# Altium PCB PuttPilot-Dev.PcbDoc
Units mm, origin at the board's own origin, x right, y up, seen from the top; angles counter-clockwise.
Board outline 110 x 50 mm, 4 copper layers (L01, L02, L03, L04), stack 0.603 mm thick; 125 components, 94 nets, 329 pads, 0 vias.
Unrouted connection lines stored in the file: 233.
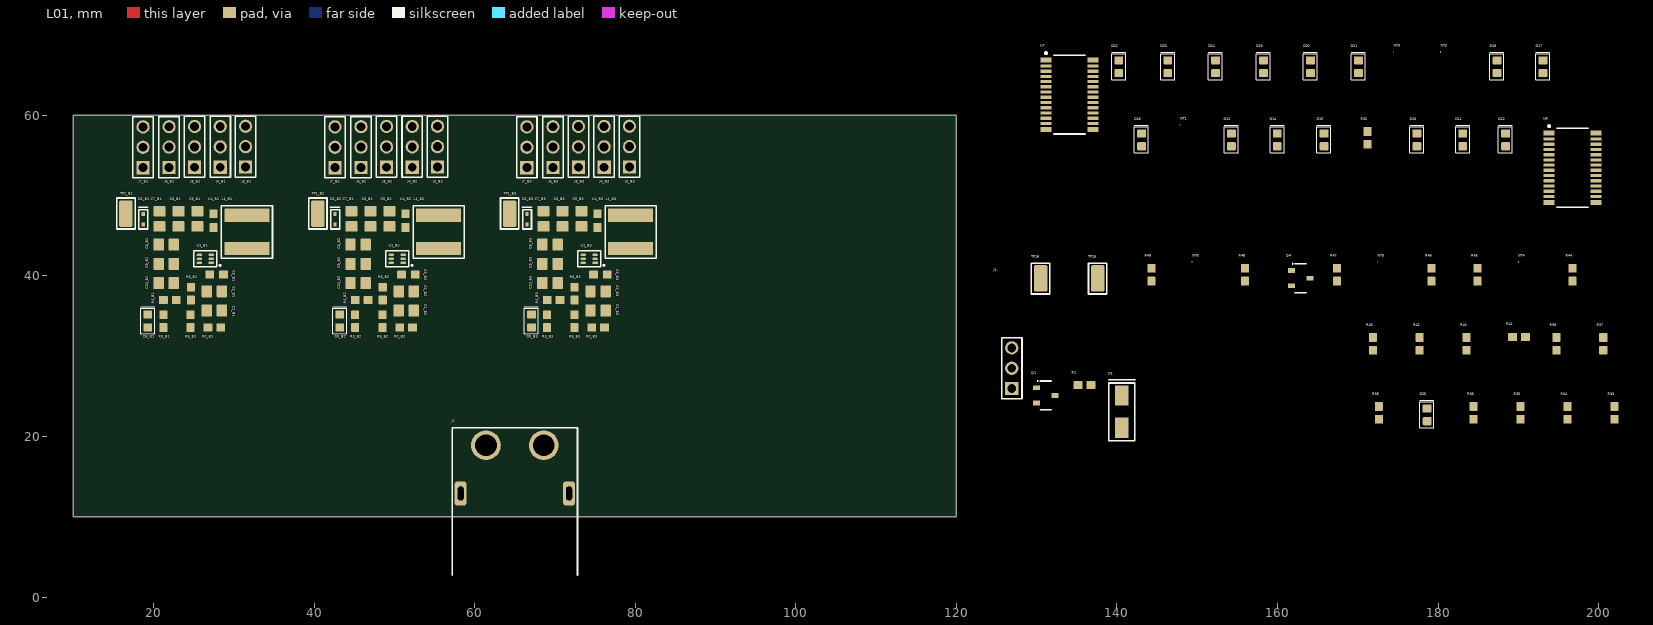
[diagram p0: L01 view]
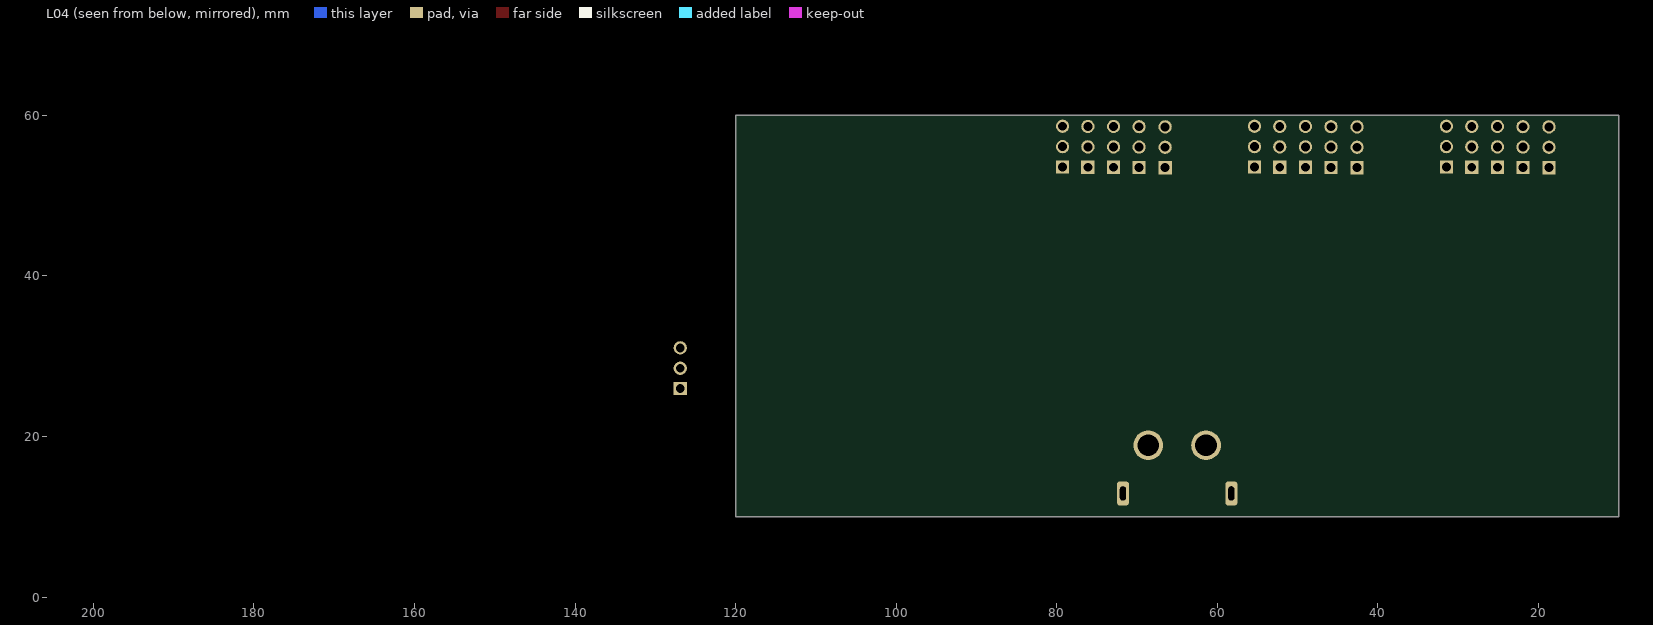
[diagram p1: L04 view, seen from below]

## Layer stack, top to bottom
Top Solder: solder mask 0.0102, Solder Resist, Dk 3.5
L01: signal copper 0.0356
Dielectric 2: prepreg 0.0711, PP-006, Dk 4.1
L02: signal copper 0.035
Dielectric 1: dielectric 0.32, FR-4, Dk 4.8
L03: signal copper 0.035
Dielectric 3: prepreg 0.0711, PP-006, Dk 4.1
L04: signal copper 0.0356
Bottom Solder: solder mask 0.0102, Solder Resist, Dk 3.5

## Board outline
10,10 10,60 120,60 120,10

## Design rules (kind name [scope] priority, off if disabled: settings)
Clearance [All] p1: gap=0.254 ignorepadtopadclearanceinfootprint=FALSE except(0: Arc-Hole Track-Hole SMDPad-Hole THPad-Hole Via-Hole Fill-Hole Poly-Hole Region-Hole Text-Hole)
PolygonConnect [All] p1: connectstyle=Relief reliefconductorwidth=0.254 reliefentries=4 polygonreliefangle="90 Angle" airgapwidth=0.254
RoomDefinition B3 [InComponentClass('B3')] p1: confinementstyle=ConfineIn formatcopy=TRUE lockcomponents=FALSE outline 62.508,31.9 83.413,31.9 83.413,68.959 62.508,68.959
RoomDefinition B2 [InComponentClass('B2')] p2: confinementstyle=ConfineIn formatcopy=TRUE lockcomponents=FALSE outline 38.604,31.9 59.508,31.9 59.508,68.959 38.604,68.959
RoomDefinition B1 [InComponentClass('B1')] p3: confinementstyle=ConfineIn formatcopy=TRUE lockcomponents=FALSE outline 14.7,31.9 35.604,31.9 35.604,68.959 14.7,68.959
RoutingVias [All] p1: holewidth=0.711 width=1.27 viastyle="Through Hole" minholewidth=0.711 minwidth=1.27 maxholewidth=0.711 maxwidth=1.27
SolderMaskExpansion [All] p1: expansion=0.102 istentingtop=FALSE
Width [All] p1: maxlimit=0.254 minlimit=0.254 preferedwidth=0.254
30 further rules are at their usual default settings.

## Classes and differential pairs
component class Hierarchal-Power: D1 J1 J2 Q1 R1
channel class Servo-Power: B1 B2 B3
net class PWM_SERVO5[1..3]: PWM_SERVO51 PWM_SERVO52 PWM_SERVO53
net class PWM_SERVO4[1..3]: PWM_SERVO41 PWM_SERVO42 PWM_SERVO43
net class PWM_SERVO3[1..3]: PWM_SERVO31 PWM_SERVO32 PWM_SERVO33
net class PWM_SERVO2[1..3]: PWM_SERVO21 PWM_SERVO22 PWM_SERVO23
net class PWM_SERVO1[1..3]: PWM_SERVO11 PWM_SERVO12 PWM_SERVO13
net class 6V[1..3]: 6V1 6V2 6V3
component class U_PWM_CONTROL: D10 D11 D12 D13 D14 D15 D16 D17 D18 D19 D20 D21 D22 D23 D24 D25 NT1 NT2 NT3 NT4 NT5 NT6 Q4 R32 R33 R34 R35 R36 R37 R38 R39 R40 R41 R42 R43 R44 R45 R46 R47 R48 R49 TP15 TP16 U6 U7
component class B3: C1_B3 C2_B3 C3_B3 C4_B3 C5_B3 C6_B3 C7_B3 C8_B3 C9_B3 C10_B3 D2_B3 D3_B3 J3_B3 J4_B3 J5_B3 J6_B3 J7_B3 L1_B3 R2_B3 R3_B3 R4_B3 R5_B3 R6_B3 TP1_B3 U1_B3
component class B2: C1_B2 C2_B2 C3_B2 C4_B2 C5_B2 C6_B2 C7_B2 C8_B2 C9_B2 C10_B2 D2_B2 D3_B2 J3_B2 J4_B2 J5_B2 J6_B2 J7_B2 L1_B2 R2_B2 R3_B2 R4_B2 R5_B2 R6_B2 TP1_B2 U1_B2
component class B1: C1_B1 C2_B1 C3_B1 C4_B1 C5_B1 C6_B1 C7_B1 C8_B1 C9_B1 C10_B1 D2_B1 D3_B1 J3_B1 J4_B1 J5_B1 J6_B1 J7_B1 L1_B1 R2_B1 R3_B1 R4_B1 R5_B1 R6_B1 TP1_B1 U1_B1

## Components (designator, comment, footprint, x,y, rotation, side; value= is the part's Value field where it differs from the comment)
C1_B1 "GRM21BR61E226ME44K" .CAP_0805 27.614,38.048 r0 top (schematic designator C1)
C1_B2 "GRM21BR61E226ME44K" .CAP_0805 51.518,38.048 r0 top (schematic designator C1)
C1_B3 "GRM21BR61E226ME44K" .CAP_0805 75.422,38.048 r0 top (schematic designator C1)
C2_B1 "GRM21BR61E226ME44K" .CAP_0805 27.614,35.635 r0 top (schematic designator C2)
C2_B2 "GRM21BR61E226ME44K" .CAP_0805 51.518,35.635 r0 top (schematic designator C2)
C2_B3 "GRM21BR61E226ME44K" .CAP_0805 75.422,35.635 r0 top (schematic designator C2)
C3_B1 "GCJ188R71H104KA12D" .CAP_0603 27.868,40.08 r0 top (schematic designator C3)
C3_B2 "GCJ188R71H104KA12D" .CAP_0603 51.772,40.08 r0 top (schematic designator C3)
C3_B3 "GCJ188R71H104KA12D" .CAP_0603 75.676,40.08 r0 top (schematic designator C3)
C4_B1 "GCJ188R71H104KA12D" .CAP_0603 27.552,46.904 r90 top (schematic designator C4)
C4_B2 "GCJ188R71H104KA12D" .CAP_0603 51.457,46.904 r90 top (schematic designator C4)
C4_B3 "GCJ188R71H104KA12D" .CAP_0603 75.361,46.904 r90 top (schematic designator C4)
C5_B1 "GRM21BR61E226ME44K" .CAP_0805 25.52,47.158 r90 top (schematic designator C5)
C5_B2 "GRM21BR61E226ME44K" .CAP_0805 49.425,47.158 r90 top (schematic designator C5)
C5_B3 "GRM21BR61E226ME44K" .CAP_0805 73.329,47.158 r90 top (schematic designator C5)
C6_B1 "GRM21BR61E226ME44K" .CAP_0805 23.158,47.158 r90 top (schematic designator C6)
C6_B2 "GRM21BR61E226ME44K" .CAP_0805 47.062,47.158 r90 top (schematic designator C6)
C6_B3 "GRM21BR61E226ME44K" .CAP_0805 70.967,47.158 r90 top (schematic designator C6)
C7_B1 "GRM21BR61E226ME44K" .CAP_0805 20.796,47.158 r90 top (schematic designator C7)
C7_B2 "GRM21BR61E226ME44K" .CAP_0805 44.7,47.158 r90 top (schematic designator C7)
C7_B3 "GRM21BR61E226ME44K" .CAP_0805 68.604,47.158 r90 top (schematic designator C7)
C8_B1 "GRM21BR61E226ME44K" .CAP_0805 21.533,43.932 r180 top (schematic designator C8)
C8_B2 "GRM21BR61E226ME44K" .CAP_0805 45.437,43.932 r180 top (schematic designator C8)
C8_B3 "GRM21BR61E226ME44K" .CAP_0805 69.341,43.932 r180 top (schematic designator C8)
C9_B1 "GRM21BR61E226ME44K" .CAP_0805 21.533,41.544 r180 top (schematic designator C9)
C9_B2 "GRM21BR61E226ME44K" .CAP_0805 45.437,41.544 r180 top (schematic designator C9)
C9_B3 "GRM21BR61E226ME44K" .CAP_0805 69.341,41.544 r180 top (schematic designator C9)
C10_B1 "GRM21BR61E226ME44K" .CAP_0805 21.533,39.131 r180 top (schematic designator C10)
C10_B2 "GRM21BR61E226ME44K" .CAP_0805 45.437,39.131 r180 top (schematic designator C10)
C10_B3 "GRM21BR61E226ME44K" .CAP_0805 69.341,39.131 r180 top (schematic designator C10)
D1 "SMAJ12A-13-F" SMAJ12A-13-F 140.6,23.083 r90 top
D2_B1 "ESD5Z6.0T1G" ESD5Z6.0T1G 18.713,47.056 r270 top (schematic designator D2)
D2_B2 "ESD5Z6.0T1G" ESD5Z6.0T1G 42.617,47.056 r270 top (schematic designator D2)
D2_B3 "ESD5Z6.0T1G" ESD5Z6.0T1G 66.522,47.056 r270 top (schematic designator D2)
D3_B1 "LTST-C191KGKT" .LED_0603 19.247,34.338 r90 top (schematic designator D3)
D3_B2 "LTST-C191KGKT" .LED_0603 43.151,34.338 r90 top (schematic designator D3)
D3_B3 "LTST-C191KGKT" .LED_0603 67.055,34.338 r90 top (schematic designator D3)
D10 "LTST-C191KGKT" .LED_0603 177.321,56.9 r90 top
D11 "LTST-C191KGKT" .LED_0603 183.036,56.9 r90 top
D12 "LTST-C191KGKT" .LED_0603 188.37,56.9 r90 top
D13 "LTST-C191KGKT" .LED_0603 154.207,56.9 r90 top
D14 "LTST-C191KGKT" .LED_0603 159.922,56.9 r90 top
D15 "LTST-C191KGKT" .LED_0603 165.764,56.9 r90 top
D16 "LTST-C191KGKT" .LED_0603 187.301,66 r90 top
D17 "LTST-C191KGKT" .LED_0603 193.016,66 r90 top
D18 "LTST-C191KGKT" .LED_0603 143.031,56.9 r90 top
D19 "LTST-C191KGKT" .LED_0603 158.218,66 r90 top
D20 "LTST-C191KGKT" .LED_0603 164.06,66 r90 top
D21 "LTST-C191KGKT" .LED_0603 170.029,66 r90 top
D22 "LTST-C191KGKT" .LED_0603 140.184,66 r90 top
D23 "LTST-C191KGKT" .LED_0603 146.28,66 r90 top
D24 "LTST-C191KGKT" .LED_0603 152.249,66 r90 top
D25 "LTST-C191KGKT" .LED_0603 178.589,22.647 r90 top
J1 "TSW-101-08-G-T-RA" HEADER_3POS_R/A_2.54MM 126.828,27.891 r0 top
J2 "XT60PW-M" XT60PW-M 65,12.9 r180 top
J3_B1 "TSW-101-08-G-T-RA" HEADER_3POS_R/A_2.54MM 31.392,55.489 r0 top (schematic designator J3)
J3_B2 "TSW-101-08-G-T-RA" HEADER_3POS_R/A_2.54MM 55.296,55.489 r0 top (schematic designator J3)
J3_B3 "TSW-101-08-G-T-RA" HEADER_3POS_R/A_2.54MM 79.2,55.489 r0 top (schematic designator J3)
J4_B1 "TSW-101-08-G-T-RA" HEADER_3POS_R/A_2.54MM 28.242,55.464 r0 top (schematic designator J4)
J4_B2 "TSW-101-08-G-T-RA" HEADER_3POS_R/A_2.54MM 52.147,55.464 r0 top (schematic designator J4)
J4_B3 "TSW-101-08-G-T-RA" HEADER_3POS_R/A_2.54MM 76.051,55.464 r0 top (schematic designator J4)
J5_B1 "TSW-101-08-G-T-RA" HEADER_3POS_R/A_2.54MM 25.042,55.464 r0 top (schematic designator J5)
J5_B2 "TSW-101-08-G-T-RA" HEADER_3POS_R/A_2.54MM 48.946,55.464 r0 top (schematic designator J5)
J5_B3 "TSW-101-08-G-T-RA" HEADER_3POS_R/A_2.54MM 72.85,55.464 r0 top (schematic designator J5)
J6_B1 "TSW-101-08-G-T-RA" HEADER_3POS_R/A_2.54MM 21.863,55.438 r0 top (schematic designator J6)
J6_B2 "TSW-101-08-G-T-RA" HEADER_3POS_R/A_2.54MM 45.767,55.438 r0 top (schematic designator J6)
J6_B3 "TSW-101-08-G-T-RA" HEADER_3POS_R/A_2.54MM 69.671,55.438 r0 top (schematic designator J6)
J7_B1 "TSW-101-08-G-T-RA" HEADER_3POS_R/A_2.54MM 18.616,55.413 r0 top (schematic designator J7)
J7_B2 "TSW-101-08-G-T-RA" HEADER_3POS_R/A_2.54MM 42.52,55.413 r0 top (schematic designator J7)
J7_B3 "TSW-101-08-G-T-RA" HEADER_3POS_R/A_2.54MM 66.424,55.413 r0 top (schematic designator J7)
L1_B1 "SRP6060FA-5R6M" SRP6060FA-5R6M 31.616,45.481 r90 top (schematic designator L1)
L1_B2 "SRP6060FA-5R6M" SRP6060FA-5R6M 55.521,45.481 r90 top (schematic designator L1)
L1_B3 "SRP6060FA-5R6M" SRP6060FA-5R6M 79.425,45.481 r90 top (schematic designator L1)
NT1 ".NET_TIE" .NET_TIE 147.857,58.805 r90 top
NT2 ".NET_TIE" .NET_TIE 180.316,67.905 r90 top
NT3 ".NET_TIE" .NET_TIE 174.474,67.905 r90 top
NT4 ".NET_TIE" .NET_TIE 190.003,41.752 r90 top
NT5 ".NET_TIE" .NET_TIE 172.477,41.752 r90 top
NT6 ".NET_TIE" .NET_TIE 149.363,41.752 r90 top
Q1 "DMN6140L-7" .SOT-23-3 131.075,24.988 r0 top
Q4 "DMN6140L-7" .SOT-23-3 162.825,39.593 r0 top
R1 "RC0603FR-071KL" .RES_0603 135.901,26.385 r0 top
R2_B1 "ERJ-3EKF2002V" .RES_0603 27.527,33.569 r0 top (schematic designator R2)
R2_B2 "ERJ-3EKF2002V" .RES_0603 51.431,33.569 r0 top (schematic designator R2)
R2_B3 "ERJ-3EKF2002V" .RES_0603 75.335,33.569 r0 top (schematic designator R2)
R3_B1 "RC0603FR-071KL" .RES_0603 21.228,34.313 r90 top (schematic designator R3)
R3_B2 "RC0603FR-071KL" .RES_0603 45.132,34.313 r90 top (schematic designator R3)
R3_B3 "RC0603FR-071KL" .RES_0603 69.036,34.313 r90 top (schematic designator R3)
R4_B1 "RC0603FR-0788K7L" .RES_0603 22.066,37.023 r180 top (schematic designator R4)
R4_B2 "RC0603FR-0788K7L" .RES_0603 45.97,37.023 r180 top (schematic designator R4)
R4_B3 "RC0603FR-0788K7L" .RES_0603 69.874,37.023 r180 top (schematic designator R4)
R5_B1 "RC0603FR-0710KL" .RES_0603 24.606,34.407 r270 top (schematic designator R5)
R5_B2 "RC0603FR-0710KL" .RES_0603 48.51,34.407 r270 top (schematic designator R5)
R5_B3 "RC0603FR-0710KL" .RES_0603 72.414,34.407 r270 top (schematic designator R5)
R6_B1 "RC0603FR-0710KL" .RES_0603 24.631,37.836 r270 top (schematic designator R6)
R6_B2 "RC0603FR-0710KL" .RES_0603 48.536,37.836 r270 top (schematic designator R6)
R6_B3 "RC0603FR-0710KL" .RES_0603 72.44,37.836 r270 top (schematic designator R6)
R32 "RC0603FR-0710KL" .RES_0603 171.225,57.154 r90 top
R33 "RC0603FR-07240RL" .RES_0603 201.957,22.901 r90 top
R34 "RC0603FR-07240RL" .RES_0603 196.115,22.901 r90 top
R35 "RC0603FR-07240RL" .RES_0603 190.273,22.901 r90 top
R36 "RC0603FR-07240RL" .RES_0603 184.431,22.901 r90 top
R37 "RC0603FR-0710KL" .RES_0603 200.578,31.501 r90 top
R38 "RC0603FR-07240RL" .RES_0603 172.62,22.901 r90 top
R39 "RC0603FR-07240RL" .RES_0603 194.736,31.501 r90 top
R40 "RC0603FR-07240RL" .RES_0603 183.56,31.501 r90 top
R41 "RC0603FR-07240RL" .RES_0603 190.037,32.39 r0 top
R42 "RC0603FR-07240RL" .RES_0603 177.718,31.501 r90 top
R43 "RC0603FR-07240RL" .RES_0603 171.876,31.501 r90 top
R44 "RC0603FR-07240RL" .RES_0603 196.734,40.101 r90 top
R45 "RC0603FR-07240RL" .RES_0603 184.923,40.101 r90 top
R46 "RC0603FR-07240RL" .RES_0603 179.208,40.101 r90 top
R47 "RC0603FR-07240RL" .RES_0603 167.397,40.101 r90 top
R48 "RC0603FR-07240RL" .RES_0603 155.967,40.101 r90 top
R49 "RC0603FR-07240RL" .RES_0603 144.283,40.101 r90 top
TP1_B1 "RCWCTE" RCWCTE 16.474,47.72 r270 top (schematic designator TP1)
TP1_B2 "RCWCTE" RCWCTE 40.378,47.72 r270 top (schematic designator TP1)
TP1_B3 "RCWCTE" RCWCTE 64.283,47.72 r270 top (schematic designator TP1)
TP15 "RCWCTE" RCWCTE 137.679,39.72 r90 top
TP16 "RCWCTE" RCWCTE 130.567,39.72 r90 top
U1_B1 "TPS566242DRLR" TPS566242DRLR 26.449,42.12 r180 top (schematic designator U1)
U1_B2 "TPS566242DRLR" TPS566242DRLR 50.353,42.12 r180 top (schematic designator U1)
U1_B3 "TPS566242DRLR" TPS566242DRLR 74.257,42.12 r180 top (schematic designator U1)
U6 "PCA9685PW,112" PCA9685PW,112 196.752,53.471 r0 top
U7 "PCA9685PW,112" PCA9685PW,112 134.088,62.571 r0 top

## Footprints (in the part's own frame and the unit in brackets; to place one, negate y for a bottom-side part, rotate by r counter-clockwise, add the part's x,y. Pads: shape width x height; smd on the part's side, far side on the other; paste and mask are expansions set on the pad)
.CAP_0603 [mm] "GENERIC 0603 CAPACITOR"
  rrect15% 1.1x1 smd: 1(-0.873,0.07) 2(0.827,0.07)
  body extent -0.9,-0.38 0.85,0.57, height 0.87
.CAP_0805 [mm] "GENERIC 0805 CAPACITOR"
  rrect15% 1.3x1.5 smd: 1(-0.995,0.036) 2(0.905,0.036)
  body extent -1.14,-0.66 1.05,0.79, height 1.39
.LED_0603 [mm] ".GENERIC 0603 LED"
  rrect20% 1x1.1 smd: 1(-0.75,-0.04) 2(0.85,-0.04)
  silkscreen extent -1.55,-0.89 1.85,0.86, body extent -0.76,-0.44 0.86,0.36, height 0.6
.NET_TIE [mm]
  rrect15% 0.1x0.1 smd paste-2539.97 mask+0: 1(-0.025,0) 2(0.025,0)
.RES_0603 [mm] "GENERIC 0603 RESISTOR"
  rrect15% 1.1x1 smd: 1(-0.757,0.011) 2(0.843,0.011)
  body extent -0.76,-0.39 0.84,0.41, height 0.46
.SOT-23-3 [mm]
  rrect15% 0.9x0.6 smd: 1(-1.096,1.073) 2(-1.096,-0.827) 3(1.204,0.123)
  silkscreen extent -1,-1.68 0.75,1.97, body extent -1.25,-1.38 1.35,1.62, height 1.1
ESD5Z6.0T1G [mm]
  rect 0.48x0.4 smd: 1(-0.66,0) 2(0.66,0)
  silkscreen extent -1.5,-0.58 1.22,0.56, body extent -0.85,-0.44 0.85,0.44, height 0.46
HEADER_3POS_R/A_2.54MM [mm]
  rect 1.65x1.65 / inner round 1.65 / far side rect 1.65x1.65 hole 1.1: 1(0.072,-1.931)
  round 1.65 hole 1.1: 2(0.072,0.609) 3(0.072,3.149)
  silkscreen extent -1.2,-3.2 1.34,4.42, body extent -1.2,-2.25 1.34,13.05, height 8.1
PCA9685PW,112 [mm]
  rect 1.35x0.6 smd: 1(-2.924,4.326) 14(-2.924,-4.324) 15(2.926,-4.324) 28(2.926,4.326)
  rect 1.35x0.4 smd: 2(-2.924,3.576) 3(-2.924,2.926) 4(-2.924,2.276) 5(-2.924,1.626) 6(-2.924,0.976) 7(-2.924,0.326) 8(-2.924,-0.324) 9(-2.924,-0.974) 10(-2.924,-1.624) 11(-2.924,-2.274) 12(-2.924,-2.924) 13(-2.924,-3.574) 16(2.926,-3.574) 17(2.926,-2.924) 18(2.926,-2.274) 19(2.926,-1.624) 20(2.926,-0.974) 21(2.926,-0.324) 22(2.926,0.326) 23(2.926,0.976) 24(2.926,1.626) 25(2.926,2.276) 26(2.926,2.926) 27(2.926,3.576)
  silkscreen extent -3.05,-4.9 1.96,5.3, body extent -3.3,-4.9 3.3,4.9, height 1.09
RCWCTE [mm]
  rrect25% 3.3x1.7 smd: 1(-0.03,0.08)
  silkscreen extent -1.98,-1.06 1.87,1.22, body extent -1.63,-0.72 1.57,0.88, height 2.01
SMAJ12A-13-F [mm]
  rect 2.5x1.7 smd: 1(-2,0) 2(2,0)
  silkscreen extent -3.62,-1.64 3.98,1.62, body extent -2.8,-1.46 2.8,1.46, height 2.35
SRP6060FA-5R6M [mm]
  rect 1.65x5.6 smd: 1(-2.075,0) 2(2.075,0)
  silkscreen extent -3.26,-3.2 3.24,3.16, body extent -3.2,-3.3 3.2,3.3, height 5.91
TPS566242DRLR [mm]
  rect 0.67x0.3 smd mask+0.075: 1(-0.74,0.5)
  oval 0.67x0.3 smd mask+0.075: 2(-0.74,0) 3(-0.74,-0.5) 4(0.74,-0.5) 5(0.74,0) 6(0.74,0.5)
  silkscreen extent -1.9,-1 1.44,1, body extent -0.8,-0.78 0.8,0.78, height 0.6
XT60PW-M [mm] "XT60 Male"
  round 3.7 hole 2.7: 1(3.6,-6) 2(-3.6,-6)
  rrect50% 1.5x3 hole 0.75 slot 1.75 at 90 deg: MH0(-6.75,0) MH1(6.75,0)
  silkscreen extent -7.8,-8.2 7.8,10.2, body extent -7.75,-7.85 7.75,10.35, height 8.41

## Part data
C1_B1 C1_B2 C1_B3 C2_B1 C2_B2 C2_B3 C5_B1 C5_B2 C5_B3 C6_B1 C6_B2 C6_B3 C7_B1 C7_B2 C7_B3 C8_B1 C8_B2 C8_B3 C9_B1 C9_B2 C9_B3 C10_B1 C10_B2 C10_B3: "CAP CER 22uF 25V X5R 0805", Capacitance=22uF, Capacitor Type=Ceramic, Manufacturer=Murata, Max Operating Temperature=85°C, Min Operating Temperature=-55°C, Negative Tolerance=20%, Package Shape=Rectangular, Package Style=SMTMeter, Rated DC Voltage (URdc)=25V, Supplier Part Number 1=1092989, Temperature Characteristics Code=X5R, Category="Ceramic Capacitors", ComponentLink1Description=https://datasheet.ciiva.com:443/pdfs/VipMasterIC/IC/MURE/MURE-S-A0002977178/MURE-S-A0002978778-1.pdf?src-supplier=IHS+Markit, ComponentLink1URL=https://datasheet.ciiva.com:443/pdfs/VipMasterIC/IC/MURE/MURE-S-A0002977178/MURE-S-A0002978778-1.pdf?src-supplier=IHS+Markit, ComponentLink2Description=http://www.mouser.com/ds/2/281/c02e-2905.pdf?src-supplier=Mouser, ComponentLink2URL=http://www.mouser.com/ds/2/281/c02e-2905.pdf?src-supplier=Mouser, ComponentLink3Description=https://datasheet.octopart.com/GRM21BR61E226ME44K-Murata-datasheet-155345081.pdf?src-supplier=Element14, ComponentLink3URL=https://datasheet.octopart.com/GRM21BR61E226ME44K-Murata-datasheet-155345081.pdf?src-supplier=Element14, ComponentLink4Description=http://search.murata.co.jp/Ceramy/image/img/A01X/G101/ENG/GRM21BR61E226ME44-01.pdf?src-supplier=Digikey, ComponentLink4URL=http://search.murata.co.jp/Ceramy/image/img/A01X/G101/ENG/GRM21BR61E226ME44-01.pdf?src-supplier=Digikey, ComponentLink5Description=https://search.murata.co.jp/Ceramy/image/img/A01X/G101/ENG/GRM21BR61E226ME44-01.pdf?src-supplier=Digikey, ComponentLink5URL=https://search.murata.co.jp/Ceramy/image/img/A01X/G101/ENG/GRM21BR61E226ME44-01.pdf?src-supplier=Digikey, ComponentLink6Description=https://datasheet.octopart.com/GRM21BR61E226ME44K-Murata-datasheet-99353850.pdf?src-supplier=Future+Electronics, ComponentLink6URL=https://datasheet.octopart.com/GRM21BR61E226ME44K-Murata-datasheet-99353850.pdf?src-supplier=Future+Electronics, ComponentLink7Description=https://datasheet.octopart.com/GRM21BR61E226ME44K-Murata-datasheet-155345081.pdf?src-supplier=Newark, ComponentLink7URL=https://datasheet.octopart.com/GRM21BR61E226ME44K-Murata-datasheet-155345081.pdf?src-supplier=Newark, ComponentLink8Description=https://datasheet.octopart.com/GRM21BR61E226ME44K-Murata-datasheet-165579666.pdf?src-supplier=TME, ComponentLink8URL=https://datasheet.octopart.com/GRM21BR61E226ME44K-Murata-datasheet-165579666.pdf?src-supplier=TME, Dielectric Material=Ceramic, Height=1.25mm, JESD-609 Code=e3, Length=2mm, Manufacturer Part Number=GRM21BR61E226ME44K, Mount="Surface Mount", Multilayer=Yes, Number of Pins=2, Packaging="Tape and Reel", Positive Tolerance=20%, Pricing 1="10000=0.0684, 20000=0.0672, 30000=0.0661 (USD)", Reach SVHC Compliant=Yes, RoHS=Yes, RoHS Compliant=Yes, Size Code=0805, Stock 1=60000, Supplier 1="Future Electronics", Terminal Finish=Nickel, Termination=Wraparound, Width=1.25mm
C3_B1 C3_B2 C3_B3 C4_B1 C4_B2 C4_B3: "CAP CER 0.1uF 50V X7R 0603", Capacitance=0.1uF, Capacitor Type=Ceramic, Manufacturer=Murata, Max Operating Temperature=125°C, Min Operating Temperature=-55°C, Negative Tolerance=10%, Package Shape=Rectangular, Package Style=SMTMeter, Rated DC Voltage (URdc)=50V, Supplier Part Number 1=1158604, Temperature Characteristics Code=X7R, Category="Ceramic Capacitors", ComponentLink1Description=https://psearch.en.murata.com:443/capacitor/product/GCJ188R71H104KA12%23.pdf?src-supplier=IHS+Markit, ComponentLink1URL=https://psearch.en.murata.com:443/capacitor/product/GCJ188R71H104KA12%23.pdf?src-supplier=IHS+Markit, ComponentLink2Description=https://datasheet.ciiva.com/135/product-135604.pdf?src-supplier=Digikey, ComponentLink2URL=https://datasheet.ciiva.com/135/product-135604.pdf?src-supplier=Digikey, ComponentLink3Description=https://datasheet.ciiva.com/26889/getdatasheetpartid-369886-26889118.pdf?src-supplier=Verical, ComponentLink3URL=https://datasheet.ciiva.com/26889/getdatasheetpartid-369886-26889118.pdf?src-supplier=Verical, ComponentLink4Description=https://datasheet.ciiva.com/135/s0717e-135605.pdf?src-supplier=Digikey, ComponentLink4URL=https://datasheet.ciiva.com/135/s0717e-135605.pdf?src-supplier=Digikey, ComponentLink5Description=https://datasheet.ciiva.com/135/s0717e-135606.pdf?src-supplier=Digikey, ComponentLink5URL=https://datasheet.ciiva.com/135/s0717e-135606.pdf?src-supplier=Digikey, ComponentLink6Description=https://datasheet.ciiva.com/16440/c03e-16440425.pdf?src-supplier=Future+Electronics, ComponentLink6URL=https://datasheet.ciiva.com/16440/c03e-16440425.pdf?src-supplier=Future+Electronics, Dielectric Material=Ceramic, Height=0.8mm, JESD-609 Code=e3, Length=1.6mm, Manufacturer Part Number=GCJ188R71H104KA12D, Mount="Surface Mount", Multilayer=Yes, Number of Pins=2, Packaging="Tape and Reel", Positive Tolerance=10%, Pricing 1="4000=0.0182, 12000=0.0178, 20000=0.0176, 80000=0.017, 120000=0.0167 (USD)", Reach SVHC Compliant=Yes, Reference Standard=AEC-Q200, RoHS=Yes, RoHS Compliant=Yes, Size Code=0603, Stock 1=3280000, Supplier 1="Future Electronics", Terminal Finish=Nickel, Termination=Wraparound, Width=0.8mm
D1: "TVS DIODE 12VWM", Breakdown Voltage-Nom=14V, Clamping Voltage-Max=19.9V, Manufacturer=Diodes, Max Breakdown Voltage=14.7V, Max Operating Temperature=150°C, Max Power Dissipation=1W, Min Breakdown Voltage=13.3V, Min Operating Temperature=-55°C, Non-rep Peak Rev Power Dis-Max=400W, Package Body Material=Plastic, Package Shape=Rectangular, Package Style="SMALL OUTLINEMeter", Peak Reflow Temperature (Cel)=260°C, Rep Pk Reverse Voltage-Max=12V, Supplier Part Number 1=SMAJ12A-FDICT-ND, Time @ Peak Reflow Temperature-Max (s)=40s, Additional Feature="EXCELLENT CLAMPING CAPABILITY", Category="TVS Diodes", ComponentLink1Description=https://datasheet.ciiva.com:443/pdfs/VipMasterIC/IC/DIOD/DIOD-S-A0009689838/DIOD-S-A0009691421-1.pdf?src-supplier=IHS+Markit, ComponentLink1URL=https://datasheet.ciiva.com:443/pdfs/VipMasterIC/IC/DIOD/DIOD-S-A0009689838/DIOD-S-A0009691421-1.pdf?src-supplier=IHS+Markit, ComponentLink2Description=https://datasheet.ciiva.com/15143/getdatasheetpartid-164236-15143864.pdf?src-supplier=Verical, ComponentLink2URL=https://datasheet.ciiva.com/15143/getdatasheetpartid-164236-15143864.pdf?src-supplier=Verical, Diode Element Material=SILICON, Diode Type="TRANS VOLTAGE SUPPRESSOR", JESD-30 Code=R-PDSO-C2, JESD-609 Code=e3, Manufacturer Part Number=SMAJ12A-13-F, Moisture Sensitivity Level=1, Number of Elements=1, Number of Pins=2, Polarity=Unidirectional, Pricing 1="1=0.29, 10=0.197, 100=0.1322, 500=0.1019, 1000=0.09178, 2000=0.08313 (USD)", Qualification Status="Not Qualified", Reach SVHC Compliant=No, RoHS=Yes, RoHS Compliant=Yes, Stock 1=25706, Supplier 1=Digikey, Surface Mount=Yes, Technology=AVALANCHE, Terminal Finish=Tin, Terminal Form="C BEND", Terminal Position=DUAL
D2_B1 D2_B2 D2_B3: "TVS DIODE 6VWM", Clamping Voltage-Max=12.4V, Manufacturer="ON Semiconductor", Max Operating Temperature=150°C, Max Power Dissipation=200mW, Min Breakdown Voltage=6.8V, Min Operating Temperature=-55°C, Non-rep Peak Rev Power Dis-Max=181W, Package Body Material=Plastic, Package Shape=Rectangular, Package Style="SMALL OUTLINEMeter", Peak Reflow Temperature (Cel)=260°C, Rep Pk Reverse Voltage-Max=6V, Supplier Part Number 1=6072663, Time @ Peak Reflow Temperature-Max (s)=40s, Additional Feature="UL RECOGNIZED", Category="ESD and Circuit Protection ICs", ComponentLink1Description=https://datasheet.ciiva.com:443/pdfs/VipMasterIC/IC/ONSM/ONSM-S-A0006325923/ONSM-S-A0006325923-1.pdf?src-supplier=IHS+Markit, ComponentLink1URL=https://datasheet.ciiva.com:443/pdfs/VipMasterIC/IC/ONSM/ONSM-S-A0006325923/ONSM-S-A0006325923-1.pdf?src-supplier=IHS+Markit, ComponentLink2Description=https://datasheet.ciiva.com/30478/0900766b8125092b-30478790.pdf?src-supplier=Rs, ComponentLink2URL=https://datasheet.ciiva.com/30478/0900766b8125092b-30478790.pdf?src-supplier=Rs, ComponentLink3Description=https://datasheet.ciiva.com/4510/esd5z2-5t1-d-241596-4510609.pdf?src-supplier=Mouser, ComponentLink3URL=https://datasheet.ciiva.com/4510/esd5z2-5t1-d-241596-4510609.pdf?src-supplier=Mouser, ComponentLink4Description=https://datasheet.ciiva.com/15143/getdatasheetpartid-148103-15143777.pdf?src-supplier=Verical, ComponentLink4URL=https://datasheet.ciiva.com/15143/getdatasheetpartid-148103-15143777.pdf?src-supplier=Verical, ComponentLink5Description=https://datasheet.ciiva.com/22642/1878252-22642024.pdf?src-supplier=Element14, ComponentLink5URL=https://datasheet.ciiva.com/22642/1878252-22642024.pdf?src-supplier=Element14, ComponentLink6Description=https://datasheet.ciiva.com/340/esd5z2-5t1-d-340699.pdf?src-supplier=Digikey, ComponentLink6URL=https://datasheet.ciiva.com/340/esd5z2-5t1-d-340699.pdf?src-supplier=Digikey, ComponentLink7Description=https://datasheet.ciiva.com/340/esd5z2-5t1-d-340700.pdf?src-supplier=Digikey, ComponentLink7URL=https://datasheet.ciiva.com/340/esd5z2-5t1-d-340700.pdf?src-supplier=Digikey, ComponentLink8Description=https://datasheet.ciiva.com/340/esd5z2-5t1-d-340701.pdf?src-supplier=Digikey, ComponentLink8URL=https://datasheet.ciiva.com/340/esd5z2-5t1-d-340701.pdf?src-supplier=Digikey, ComponentLink9Description=https://datasheet.ciiva.com/3304/esd5z2-5t1-d-3304009.pdf?src-supplier=Avnet, ComponentLink9URL=https://datasheet.ciiva.com/3304/esd5z2-5t1-d-3304009.pdf?src-supplier=Avnet, Diode Element Material=SILICON, Diode Type="TRANS VOLTAGE SUPPRESSOR", JESD-30 Code=R-PDSO-F2, JESD-609 Code=e3, Manufacturer Part Number=ESD5Z6.0T1G, Moisture Sensitivity Level=1, Number of Elements=1, Number of Pins=2, Polarity=Unidirectional, Pricing 1="3000=0.0199, 12000=0.0191, 45000=0.0183, 75000=0.018, 150000=0.0171 (USD)", Qualification Status="Not Qualified", Reach SVHC Compliant=Yes, Reference Standard=IEC-61000-4-2, RoHS=Yes, RoHS Compliant=Yes, Stock 1=543000, Supplier 1="Future Electronics", Surface Mount=Yes, Technology=AVALANCHE, Terminal Finish=Tin, Terminal Form=Flat, Terminal Position=DUAL
D3_B1 D3_B2 D3_B3 D10 D11 D12 D13 D14 D15 D16 D17 D18 D19 D20 D21 D22 D23 D24 D25: "LED GREEN 2V 0603", Color=Green, Forward Current-Max=30mA, Forward Voltage-Max=2.4V, Manufacturer="Vishay Lite-On", Max Operating Temperature=85°C, Min Operating Temperature=-55°C, Reverse Voltage-Max=5V, Supplier Part Number 1=160-1446-1-ND, Color@wavelength=Green, ComponentLink1Description=https://datasheet.ciiva.com:443/pdfs/VipMasterIC/IC/LITE/LITE-S-A0003156116/LITE-S-A0003156116-1.pdf?src-supplier=IHS+Markit, ComponentLink1URL=https://datasheet.ciiva.com:443/pdfs/VipMasterIC/IC/LITE/LITE-S-A0003156116/LITE-S-A0003156116-1.pdf?src-supplier=IHS+Markit, ComponentLink2Description=https://datasheet.ciiva.com/2109/ltst-c191kgkt-2109973.pdf?src-supplier=Digikey, ComponentLink2URL=https://datasheet.ciiva.com/2109/ltst-c191kgkt-2109973.pdf?src-supplier=Digikey, JESD-609 Code=e3, Lens Style="WATER CLEAR", Luminous Intensity-Nom=35mcd, Manufacturer Part Number=LTST-C191KGKT, Mount="Surface Mount", Number of Functions=1, Number of Pins=2, Optoelectronic Device Type="SINGLE COLOR LED", Overall Height=0.55mm, Packaging="Tape and Reel", Pricing 1="1=0.22, 10=0.121, 100=0.0721, 500=0.05324, 1000=0.04748, 2000=0.04278 (USD)", Reach SVHC Compliant=Yes, RoHS=Yes, RoHS Compliant=Yes, Shape=Rectangular, Size=1.1mm, Stock 1=171853, Supplier 1=Digikey, Terminal Finish=Tin, Terminal Pitch=1.5mm, Viewing Angle=130°
J1 J3_B1 J3_B2 J3_B3 J4_B1 J4_B2 J4_B3 J5_B1 J5_B2 J5_B3 J6_B1 J6_B2 J6_B3 J7_B1 J7_B2 J7_B3: "CONN HEADER R/A 3POS 2.54MM"
J2: "XT60PW Male", Manufacturer=Unclassified, Supplier Part Number 1=1805375, Manufacturer Part Number=XT60PW-M
L1_B1 L1_B2 L1_B3: "FIXED IND 5.6uH 10A 15.8mOhm", Current Rating=10A, DC Resistance=15.8m, Inductance=5.6uH, Inductor Type="GENERAL PURPOSE INDUCTOR", Manufacturer=Bourns, Supplier Part Number 1=SRP6060FA-5R6MCT-ND, Category="Fixed Inductors", ComponentLink1Description=https://datasheet.ciiva.com:443/pdfs/VipMasterIC/IC/BOUR/BOUR-S-A0006601820/BOUR-S-A0006601820-1.pdf?src-supplier=IHS+Markit, ComponentLink1URL=https://datasheet.ciiva.com:443/pdfs/VipMasterIC/IC/BOUR/BOUR-S-A0006601820/BOUR-S-A0006601820-1.pdf?src-supplier=IHS+Markit, ComponentLink2Description=https://www.bourns.com/docs/Product-Datasheets/SRP6060FA.pdf?src-supplier=Digikey, ComponentLink2URL=https://www.bourns.com/docs/Product-Datasheets/SRP6060FA.pdf?src-supplier=Digikey, ComponentLink3Description=https://datasheet.octopart.com/SRP6060FA-5R6M-Bourns-datasheet-154834317.pdf?src-supplier=Electro+Sonic, ComponentLink3URL=https://datasheet.octopart.com/SRP6060FA-5R6M-Bourns-datasheet-154834317.pdf?src-supplier=Electro+Sonic, ComponentLink4Description=https://datasheet.octopart.com/SRP6060FA-5R6M-Bourns-datasheet-110646386.pdf?src-supplier=Master+Electronics, ComponentLink4URL=https://datasheet.octopart.com/SRP6060FA-5R6M-Bourns-datasheet-110646386.pdf?src-supplier=Master+Electronics, Manufacturer Part Number=SRP6060FA-5R6M, Pricing 1="1=1.86, 10=1.444, 25=1.3052, 50=1.209, 100=1.1199, 250=1.01164 (USD)", Reach SVHC Compliant=Yes, RoHS=Yes, RoHS Compliant=Yes, Stock 1=1553, Supplier 1=Digikey
NT1 NT2 NT3 NT4 NT5 NT6: ".GENERIC NET TIE"
Q1 Q4: "MOSFET N-CH 60V 1.6A SOT-23", Case/Package=SOT-23, Continuous Drain Current (ID)=1.6A, Drain to Source Resistance=140mR, Drain to Source Voltage (Vdss)=60V, Gate to Source Voltage (Vgs)=20V, Input Capacitance=315pF, Manufacturer=Diodes, Max Operating Temperature=150°C, Max Power Dissipation=700mW, Min Operating Temperature=-55°C, Package Quantity=1, Supplier Part Number 1=4046633, Threshold Voltage=3V, Category=MOSFETs, ComponentLink1Description=https://datasheet.ciiva.com/29747/dmn6140l-29747654.pdf?src-supplier=Digikey, ComponentLink1URL=https://datasheet.ciiva.com/29747/dmn6140l-29747654.pdf?src-supplier=Digikey, ComponentLink2Description=https://datasheet.ciiva.com/29747/dmn6140l-29747660.pdf?src-supplier=Digikey, ComponentLink2URL=https://datasheet.ciiva.com/29747/dmn6140l-29747660.pdf?src-supplier=Digikey, Fall Time=2.7ns, Lead Free="Lead Free", Manufacturer Part Number=DMN6140L-7, Mount="Surface Mount", Number of Channels=1, Number of Pins=3, Packaging="Tape and Reel", Polarity=N-CHANNEL, Pricing 1="3000=0.0489, 9000=0.047, 15000=0.0462, 45000=0.0445, 75000=0.043 (USD)", Rds On Max=140mR, Reach SVHC Compliant=No, Rise Time=3.6ns, RoHS=Yes, RoHS Compliant=Yes, Series=-, Stock 1=624000, Supplier 1="Future Electronics", Turn-Off Delay Time=16.3ns, Turn-On Delay Time=2.6ns, Weight=0.000282oz
R1 R3_B1 R3_B2 R3_B3: "RES 1K OHM 0603", Manufacturer=Yageo, Max Operating Temperature=155°C, Min Operating Temperature=-55°C, Package Height=0.45mm, Package Length=1.6mm, Package Shape=Rectangular, Package Style=SMTMeter, Package Width=0.8mm, Rated Power Dissipation (P)=100mW, Rated Temperature=70°C, Resistance=1k, Resistor Type="FIXED RESISTOR", Supplier Part Number 1=4016291, Temperature Coefficient=100ppm/°C, Tolerance=1%, Working Voltage=75V, Additional Feature="LASER TRIMMABLE", Category="Chip SMD Resistors", ComponentLink1Description=https://datasheet.ciiva.com:443/pdfs/VipMasterIC/IC/YAGO/YAGO-S-A0008145938/YAGO-S-A0008145938-1.pdf?src-supplier=IHS+Markit, ComponentLink1URL=https://datasheet.ciiva.com:443/pdfs/VipMasterIC/IC/YAGO/YAGO-S-A0008145938/YAGO-S-A0008145938-1.pdf?src-supplier=IHS+Markit, ComponentLink2Description=https://datasheet.ciiva.com/11808/0900766b80f96399-11808081.pdf?src-supplier=Rs, ComponentLink2URL=https://datasheet.ciiva.com/11808/0900766b80f96399-11808081.pdf?src-supplier=Rs, ComponentLink3Description=https://datasheet.ciiva.com/8896/pyu-rc0603-51-rohs-l-4-8896106.pdf?src-supplier=Avnet, ComponentLink3URL=https://datasheet.ciiva.com/8896/pyu-rc0603-51-rohs-l-4-8896106.pdf?src-supplier=Avnet, ComponentLink4Description=https://datasheet.ciiva.com/7660/1868787-7660790.pdf?src-supplier=Element14, ComponentLink4URL=https://datasheet.ciiva.com/7660/1868787-7660790.pdf?src-supplier=Element14, ComponentLink5Description=https://datasheet.ciiva.com/7746/1738695-7746279.pdf?src-supplier=Element14, ComponentLink5URL=https://datasheet.ciiva.com/7746/1738695-7746279.pdf?src-supplier=Element14, ComponentLink6Description=https://datasheet.ciiva.com/7746/1686128-7746280.pdf?src-supplier=Element14, ComponentLink6URL=https://datasheet.ciiva.com/7746/1686128-7746280.pdf?src-supplier=Element14, ComponentLink7Description=https://datasheet.ciiva.com/7746/1738695-7746281.pdf?src-supplier=Element14, ComponentLink7URL=https://datasheet.ciiva.com/7746/1738695-7746281.pdf?src-supplier=Element14, ComponentLink8Description=https://datasheet.ciiva.com/7983/443971-7983613.pdf?src-supplier=Element14, ComponentLink8URL=https://datasheet.ciiva.com/7983/443971-7983613.pdf?src-supplier=Element14, ComponentLink9Description=https://datasheet.ciiva.com/15189/getdatasheetpartid-404327-15189644.pdf?src-supplier=Verical, ComponentLink9URL=https://datasheet.ciiva.com/15189/getdatasheetpartid-404327-15189644.pdf?src-supplier=Verical, Construction=Chip, JESD-609 Code=e3, Manufacturer Part Number=RC0603FR-071KL, Mount="Surface Mount", Number of Pins=2, Packaging="Tape and Reel", Pricing 1="5000=0.0026, 50000=0.0025, 150000=0.0024, 375000=0.0023, 1000000=0.0022 (USD)", Reach SVHC Compliant=Yes, RoHS=Yes, RoHS Compliant=Yes, Size Code=0603, Stock 1=12810000, Supplier 1="Future Electronics", Technology="METAL GLAZE/THICK FILM", Terminal Finish=Nickel, Termination=Wraparound
R2_B1 R2_B2 R2_B3: "RES 20K OHM 0603", Manufacturer=Panasonic, Max Operating Temperature=155°C, Min Operating Temperature=-55°C, Package Height=0.45mm, Package Length=1.6mm, Package Shape=Rectangular, Package Style=SMTMeter, Package Width=0.8mm, Rated Power Dissipation (P)=100mW, Rated Temperature=70°C, Resistance=20k, Resistor Type="FIXED RESISTOR", Supplier Part Number 1=667-ERJ-3EKF2002V, Temperature Coefficient=100ppm/°C, Tolerance=1%, Working Voltage=75V, Category="Chip SMD Resistors", ComponentLink1Description=https://datasheet.ciiva.com:443/pdfs/VipMasterIC/IC/PANA/PANA-S-A0009889626/PANA-S-A0009889626-1.pdf?src-supplier=IHS+Markit, ComponentLink1URL=https://datasheet.ciiva.com:443/pdfs/VipMasterIC/IC/PANA/PANA-S-A0009889626/PANA-S-A0009889626-1.pdf?src-supplier=IHS+Markit, ComponentLink2Description=https://datasheet.ciiva.com/15158/getdatasheetpartid-248555-15158987.pdf?src-supplier=Verical, ComponentLink2URL=https://datasheet.ciiva.com/15158/getdatasheetpartid-248555-15158987.pdf?src-supplier=Verical, ComponentLink3Description=https://datasheet.ciiva.com/28688/1678782-28688604.pdf?src-supplier=Element14, ComponentLink3URL=https://datasheet.ciiva.com/28688/1678782-28688604.pdf?src-supplier=Element14, ComponentLink4Description=https://datasheet.ciiva.com/46377/1678782-46377365.pdf?src-supplier=Element14, ComponentLink4URL=https://datasheet.ciiva.com/46377/1678782-46377365.pdf?src-supplier=Element14, ComponentLink5Description=https://datasheet.ciiva.com/22749/1678782-22749661.pdf?src-supplier=Element14, ComponentLink5URL=https://datasheet.ciiva.com/22749/1678782-22749661.pdf?src-supplier=Element14, ComponentLink6Description=https://datasheet.ciiva.com/30218/aoa0000ce2-30218069.pdf?src-supplier=Onlinecomponents.com, ComponentLink6URL=https://datasheet.ciiva.com/30218/aoa0000ce2-30218069.pdf?src-supplier=Onlinecomponents.com, Construction=Rectangular, JESD-609 Code=e3, Manufacturer Part Number=ERJ-3EKF2002V, Mount="Surface Mount", Number of Pins=2, Packaging="Tape and Reel", Pricing 1="1=0.1, 10=0.02, 50=0.02, 100=0.012, 1000=0.009, 5000=0.005, 10000=0.005, 25000=0.004 (USD)", Reach SVHC Compliant=Yes, Reference Standard=AEC-Q200, RoHS=Yes, RoHS Compliant=Yes, Size Code=0603, Stock 1=221599, Supplier 1=Mouser, Technology="METAL GLAZE/THICK FILM", Terminal Finish=Nickel, Termination=Wraparound
R4_B1 R4_B2 R4_B3: "RES 88.7K OHM 0603", Manufacturer=Yageo, Max Operating Temperature=155°C, Min Operating Temperature=-55°C, Package Height=0.45mm, Package Length=1.6mm, Package Shape=Rectangular, Package Style=SMTMeter, Package Width=0.8mm, Rated Power Dissipation (P)=100mW, Rated Temperature=70°C, Resistance=88.7k, Resistor Type="FIXED RESISTOR", Supplier Part Number 1=6138945, Temperature Coefficient=100ppm/°C, Tolerance=1%, Working Voltage=75V, Additional Feature="LASER TRIMMABLE", Category="Chip SMD Resistors", ComponentLink1Description=https://datasheet.ciiva.com:443/pdfs/VipMasterIC/IC/YAGO/YAGO-S-A0008145938/YAGO-S-A0008145938-1.pdf?src-supplier=IHS+Markit, ComponentLink1URL=https://datasheet.ciiva.com:443/pdfs/VipMasterIC/IC/YAGO/YAGO-S-A0008145938/YAGO-S-A0008145938-1.pdf?src-supplier=IHS+Markit, ComponentLink2Description=https://datasheet.ciiva.com/2454/pyu-r-int-thick-7-2454108.pdf?src-supplier=Digikey, ComponentLink2URL=https://datasheet.ciiva.com/2454/pyu-r-int-thick-7-2454108.pdf?src-supplier=Digikey, ComponentLink3Description=https://datasheet.ciiva.com/2454/pyu-r-int-thick-7-2454109.pdf?src-supplier=Digikey, ComponentLink3URL=https://datasheet.ciiva.com/2454/pyu-r-int-thick-7-2454109.pdf?src-supplier=Digikey, ComponentLink4Description=https://datasheet.ciiva.com/2454/pyu-r-int-thick-7-2454110.pdf?src-supplier=Digikey, ComponentLink4URL=https://datasheet.ciiva.com/2454/pyu-r-int-thick-7-2454110.pdf?src-supplier=Digikey, ComponentLink5Description=https://datasheet.ciiva.com/8883/pyu-rc0603-51-rohs-l-4-8883082.pdf?src-supplier=Avnet, ComponentLink5URL=https://datasheet.ciiva.com/8883/pyu-rc0603-51-rohs-l-4-8883082.pdf?src-supplier=Avnet, Construction=Chip, JESD-609 Code=e3, Manufacturer Part Number=RC0603FR-0788K7L, Mount="Surface Mount", Number of Pins=2, Packaging="Tape and Reel", Pricing 1="5000=0.0014, 50000=0.0025, 75000=0.0013, 150000=0.0024, 250000=0.0013, 375000=0.0023, 750000=0.0012, 1000000=0.0022, 2500000=0.0011 (USD)", Reach SVHC Compliant=Yes, RoHS=Yes, RoHS Compliant=Yes, Size Code=0603, Stock 1=485000, Supplier 1="Future Electronics", Technology="METAL GLAZE/THICK FILM", Terminal Finish=Nickel, Termination=Wraparound
R5_B1 R5_B2 R5_B3 R6_B1 R6_B2 R6_B3 R32 R37: "RES 10K OHM 0603", Manufacturer=Yageo, Max Operating Temperature=155°C, Min Operating Temperature=-55°C, Package Height=0.45mm, Package Length=1.6mm, Package Shape=Rectangular, Package Style=SMTMeter, Package Width=0.8mm, Rated Power Dissipation (P)=100mW, Rated Temperature=70°C, Resistance=10k, Resistor Type="FIXED RESISTOR", Supplier Part Number 1=4023214, Temperature Coefficient=100ppm/°C, Tolerance=1%, Working Voltage=75V, Additional Feature="LASER TRIMMABLE", Category="Chip SMD Resistors", ComponentLink1Description=https://datasheet.ciiva.com:443/pdfs/VipMasterIC/IC/YAGO/YAGO-S-A0008145938/YAGO-S-A0008145938-1.pdf?src-supplier=IHS+Markit, ComponentLink1URL=https://datasheet.ciiva.com:443/pdfs/VipMasterIC/IC/YAGO/YAGO-S-A0008145938/YAGO-S-A0008145938-1.pdf?src-supplier=IHS+Markit, ComponentLink2Description=https://datasheet.ciiva.com/22747/443971-22747519.pdf?src-supplier=Element14, ComponentLink2URL=https://datasheet.ciiva.com/22747/443971-22747519.pdf?src-supplier=Element14, ComponentLink3Description=https://datasheet.ciiva.com/46440/1868787-46440891.pdf?src-supplier=Element14, ComponentLink3URL=https://datasheet.ciiva.com/46440/1868787-46440891.pdf?src-supplier=Element14, ComponentLink4Description=https://datasheet.ciiva.com/15189/getdatasheetpartid-409289-15189591.pdf?src-supplier=Verical, ComponentLink4URL=https://datasheet.ciiva.com/15189/getdatasheetpartid-409289-15189591.pdf?src-supplier=Verical, ComponentLink5Description=https://datasheet.ciiva.com/7660/38590-7660789.pdf?src-supplier=Element14, ComponentLink5URL=https://datasheet.ciiva.com/7660/38590-7660789.pdf?src-supplier=Element14, ComponentLink6Description=https://datasheet.ciiva.com/7746/1738695-7746239.pdf?src-supplier=Element14, ComponentLink6URL=https://datasheet.ciiva.com/7746/1738695-7746239.pdf?src-supplier=Element14, ComponentLink7Description=https://datasheet.ciiva.com/7983/443971-7983596.pdf?src-supplier=Element14, ComponentLink7URL=https://datasheet.ciiva.com/7983/443971-7983596.pdf?src-supplier=Element14, Construction=Chip, JESD-609 Code=e3, Manufacturer Part Number=RC0603FR-0710KL, Mount="Surface Mount", Number of Pins=2, Packaging="Tape and Reel", Pricing 1="5000=0.0026, 50000=0.0025, 150000=0.0024, 375000=0.0023, 1000000=0.0022 (USD)", Reach SVHC Compliant=Yes, RoHS=Yes, RoHS Compliant=Yes, Size Code=0603, Stock 1=30355000, Supplier 1="Future Electronics", Technology="METAL GLAZE/THICK FILM", Terminal Finish=Nickel, Termination=Wraparound
R33 R34 R35 R36 R38 R39 R40 R41 R42 R43 R44 R45 R46 R47 R48 R49: "RES 240 OHM 0603", Manufacturer=Yageo, Max Operating Temperature=155°C, Min Operating Temperature=-55°C, Package Height=0.45mm, Package Length=1.6mm, Package Shape=Rectangular, Package Style=SMTMeter, Package Width=0.8mm, Rated Power Dissipation (P)=100mW, Rated Temperature=70°C, Resistance=240R, Resistor Type="FIXED RESISTOR", Supplier Part Number 1=5308184, Temperature Coefficient=100ppm/°C, Tolerance=1%, Working Voltage=75V, Additional Feature="LASER TRIMMABLE", Category="Chip SMD Resistors", ComponentLink1Description=https://datasheet.ciiva.com:443/pdfs/VipMasterIC/IC/YAGO/YAGO-S-A0008145938/YAGO-S-A0008145938-1.pdf?src-supplier=IHS+Markit, ComponentLink1URL=https://datasheet.ciiva.com:443/pdfs/VipMasterIC/IC/YAGO/YAGO-S-A0008145938/YAGO-S-A0008145938-1.pdf?src-supplier=IHS+Markit, ComponentLink2Description=https://datasheet.ciiva.com/2508/pyu-r-int-thick-7-2508497.pdf?src-supplier=Digikey, ComponentLink2URL=https://datasheet.ciiva.com/2508/pyu-r-int-thick-7-2508497.pdf?src-supplier=Digikey, ComponentLink3Description=https://datasheet.ciiva.com/2508/pyu-r-int-thick-7-2508498.pdf?src-supplier=Digikey, ComponentLink3URL=https://datasheet.ciiva.com/2508/pyu-r-int-thick-7-2508498.pdf?src-supplier=Digikey, ComponentLink4Description=https://datasheet.ciiva.com/2508/pyu-r-int-thick-7-2508499.pdf?src-supplier=Digikey, ComponentLink4URL=https://datasheet.ciiva.com/2508/pyu-r-int-thick-7-2508499.pdf?src-supplier=Digikey, Construction=Chip, JESD-609 Code=e3, Manufacturer Part Number=RC0603FR-07240RL, Mount="Surface Mount", Number of Pins=2, Packaging="Tape and Reel", Pricing 1="5000=0.0026, 50000=0.0025, 150000=0.0024, 375000=0.0023, 1000000=0.0022 (USD)", Reach SVHC Compliant=Yes, RoHS=Yes, RoHS Compliant=Yes, Size Code=0603, Stock 1=1760000, Supplier 1="Future Electronics", Technology="METAL GLAZE/THICK FILM", Terminal Finish=Nickel, Termination=Wraparound
TP1_B1 TP1_B2 TP1_B3 TP15 TP16: "SMT Test Point", Case Code (Imperial)=1206, Case Code (Metric)=3216, Current Rating=2A, Manufacturer="KOA Speer", Max Operating Temperature=125°C, Min Operating Temperature=-55°C, Resistance=0R, Supplier Part Number 1=2019-RCWCTECT-ND, Case/Package=1206, Category="Chip SMD Resistors", ComponentLink1Description=https://datasheet.ciiva.com/34302/1876186-34302940.pdf?src-supplier=Jameco, ComponentLink1URL=https://datasheet.ciiva.com/34302/1876186-34302940.pdf?src-supplier=Jameco, ComponentLink2Description=https://datasheet.ciiva.com/5556/rc-5556236.pdf?src-supplier=Mouser, ComponentLink2URL=https://datasheet.ciiva.com/5556/rc-5556236.pdf?src-supplier=Mouser, ComponentLink3Description=https://datasheet.ciiva.com/26821/getdatasheetpartid-110197-26821157.pdf?src-supplier=Verical, ComponentLink3URL=https://datasheet.ciiva.com/26821/getdatasheetpartid-110197-26821157.pdf?src-supplier=Verical, Contact Material=Copper,Tin, Depth=1.6mm, Height=2mm, Length=3.2mm, Manufacturer Part Number=RCWCTE, Military Standard=Not, Mount="Surface Mount", Number of Contacts=1, Packaging="Tape and Reel", Pricing 1="1=0.2, 10=0.15, 25=0.1344, 50=0.1238, 100=0.1141, 250=0.10268, 500=0.09488, 1000=0.08781 (USD)", RoHS=Yes, RoHS Compliant=Yes, Series=RC, Stock 1=56953, Supplier 1=Digikey, Termination=SMD/SMT, Width=1.6mm
U1_B1 U1_B2 U1_B3: "BUCK 3V-16V 6A SOT-563", Manufacturer="Texas Instruments", Supplier Part Number 1=595-TPS566242DRLR, Category="Voltage Regulators - Switching", Manufacturer Part Number=TPS566242DRLR, Pricing 1="1=0.77, 10=0.667, 50=0.667, 100=0.511, 1000=0.324, 10000=0.259 (USD)", RoHS=No, Stock 1=5599, Supplier 1=Mouser
U6 U7: "I2C LED Driver", Manufacturer="NXP Semiconductors", Max Operating Temperature=85°C, Max Supply Voltage=5.5V, Min Operating Temperature=-40°C, Min Supply Voltage=2.3V, Package Body Material=Plastic, Package Code=TSSOP, Package Equivalence Code=TSSOP28,.25, Package Shape=Rectangular, Package Style="SMALL OUTLINE, THIN PROFILE, SHRINK PITCHMeter", Peak Reflow Temperature (Cel)=260°C, Power Supplies=2.5/5V, Supplier Part Number 1=85AC2130, Supply Voltage-Nom=3V, Temperature Grade=INDUSTRIAL, Time @ Peak Reflow Temperature-Max (s)=30s, Category="LED Drivers", ComponentLink1Description=https://datasheet.ciiva.com:443/pdfs/VipMasterIC/IC/PHGL/PHGL-S-A0000775254/PHGL-S-A0000775254-1.pdf?src-supplier=IHS+Markit, ComponentLink1URL=https://datasheet.ciiva.com:443/pdfs/VipMasterIC/IC/PHGL/PHGL-S-A0000775254/PHGL-S-A0000775254-1.pdf?src-supplier=IHS+Markit, ComponentLink2Description=https://datasheet.ciiva.com/1945/pca9685-1945096.pdf?src-supplier=Digikey, ComponentLink2URL=https://datasheet.ciiva.com/1945/pca9685-1945096.pdf?src-supplier=Digikey, ComponentLink3Description=https://datasheet.ciiva.com/8125/pca9685-8125354.pdf?src-supplier=Avnet, ComponentLink3URL=https://datasheet.ciiva.com/8125/pca9685-8125354.pdf?src-supplier=Avnet, Data Input Mode=SERIAL, fmax-Min=1MHz, Height - Seated (Max)=1.1mm, Interface IC Type="LED DISPLAY DRIVER", JESD-30 Code=R-PDSO-G28, JESD-609 Code=e4, Length=9.7mm, Manufacturer Part Number=PCA9685PW,112, Moisture Sensitivity Level=1, Multiplexed Display Capability=No, Number of Functions=1, Number of Pins=28, Number of Segments=16, Pricing 1="1=1.3, 10=1.3, 25=1.3, 50=1.3, 100=1.3, 250=1.29, 500=1.27 (USD)", Qualification Status="Not Qualified", Reach SVHC Compliant=Yes, RoHS=Yes, RoHS Compliant=Yes, Stock 1=13575, Supplier 1=Newark, Surface Mount=Yes, Terminal Finish=Gold, Terminal Form="Gull Wing", Terminal Pitch=0.65mm, Terminal Position=DUAL, Width=4.4mm

## Nets (pads, with @x,y where several pads share a name; then routed paths per layer and width w, separated by ;. In a path a pad name is that pad's centre, name@x,y a point inside that pad or via, vN(x,y) a via of type N, cw(c..) or ccw(c..) an arc to the next point about the centre after c; other vN are vias at no path point)
6V1: C4_B1.2 C5_B1.2 C6_B1.2 C7_B1.2 C8_B1.2 C9_B1.2 C10_B1.2 D2_B1.1 J3_B1.2 J4_B1.2 J5_B1.2 J6_B1.2 J7_B1.2 L1_B1.2 R3_B1.2 R4_B1.2 TP1_B1.1
6V2: C4_B2.2 C5_B2.2 C6_B2.2 C7_B2.2 C8_B2.2 C9_B2.2 C10_B2.2 D2_B2.1 J3_B2.2 J4_B2.2 J5_B2.2 J6_B2.2 J7_B2.2 L1_B2.2 R3_B2.2 R4_B2.2 TP1_B2.1
6V3: C4_B3.2 C5_B3.2 C6_B3.2 C7_B3.2 C8_B3.2 C9_B3.2 C10_B3.2 D2_B3.1 J3_B3.2 J4_B3.2 J5_B3.2 J6_B3.2 J7_B3.2 L1_B3.2 R3_B3.2 R4_B3.2 TP1_B3.1
6V_BUS1: J1.2
6V_EN_B1: R2_B1.1 R5_B1.2 U1_B1.5
6V_EN_B2: R2_B2.1 R5_B2.2 U1_B2.5
6V_EN_B3: R2_B3.1 R5_B3.2 U1_B3.5
6V_FB_B1: R4_B1.1 R6_B1.2 U1_B1.6
6V_FB_B2: R4_B2.1 R6_B2.2 U1_B2.6
6V_FB_B3: R4_B3.1 R6_B3.2 U1_B3.6
6V_SW_B1: L1_B1.1 U1_B1.2
6V_SW_B2: L1_B2.1 U1_B2.2
6V_SW_B3: L1_B3.1 U1_B3.2
12V: C1_B1.2 C1_B2.2 C1_B3.2 C2_B1.2 C2_B2.2 C2_B3.2 C3_B1.2 C3_B2.2 C3_B3.2 D1.2 J2.1 R2_B1.2 R2_B2.2 R2_B3.2 U1_B1.1 U1_B2.1 U1_B3.1
GND: C1_B1.1 C1_B2.1 C1_B3.1 C2_B1.1 C2_B2.1 C2_B3.1 C3_B1.1 C3_B2.1 C3_B3.1 C4_B1.1 C4_B2.1 C4_B3.1 C5_B1.1 C5_B2.1 C5_B3.1 C6_B1.1 C6_B2.1 C6_B3.1 C7_B1.1 C7_B2.1 C7_B3.1 C8_B1.1 C8_B2.1 C8_B3.1 C9_B1.1 C9_B2.1 C9_B3.1 C10_B1.1 C10_B2.1 C10_B3.1 D1.1 D2_B1.2 D2_B2.2 D2_B3.2 D3_B1.2 D3_B2.2 D3_B3.2 J1.3 J2.2 J3_B1.3 J3_B2.3 J3_B3.3 J4_B1.3 J4_B2.3 J4_B3.3 J5_B1.3 J5_B2.3 J5_B3.3 J6_B1.3 J6_B2.3 J6_B3.3 J7_B1.3 J7_B2.3 J7_B3.3 NT1.1 NT2.1 NT3.1 NT4.1 NT5.1 NT6.1 Q1.2 Q4.2 R5_B1.1 R5_B2.1 R5_B3.1 R6_B1.1 R6_B2.1 R6_B3.1 R32.1 R37.1 U1_B1.3 U1_B1.4 U1_B2.3 U1_B2.4 U1_B3.3 U1_B3.4 U6.14 U6.25 U7.14 U7.25
I2C_LED_A0: D10.1 D11.1 D12.1 D13.1 D14.1 D15.1 D16.1 D17.1 D18.1 D19.1 D20.1 D21.1 D22.1 D23.1 D24.1 D25.1 R1.2 U6.1 U6.2 U6.3 U6.28 U7.1 U7.3 U7.5 U7.28
I2C_LED_A1: NT4.2 U7.2
I2C_LED_A3: NT5.2 U7.4
I2C_LED_A5: NT6.2 U7.24
I2C_PWM_A3: NT1.2 U6.4
I2C_PWM_A4: NT2.2 U6.5
I2C_PWM_A5: NT3.2 U6.24
I2C_SCL: TP16.1 U6.26 U7.26
I2C_SDA: TP15.1 U6.27 U7.27
LED_PWM_0: Q4.1 U7.6
LED_PWM_1: R33.1 U7.7
LED_PWM_1_n: D10.2 R33.2
LED_PWM_2: R34.1 U7.8
LED_PWM_2_n: D13.2 R34.2
LED_PWM_3: R35.1 U7.9
LED_PWM_3_n: D16.2 R35.2
LED_PWM_4: R36.1 U7.10
LED_PWM_4_n: D19.2 R36.2
LED_PWM_5: R38.1 U7.11
LED_PWM_5_n: D22.2 R38.2
LED_PWM_6: R39.1 U7.12
LED_PWM_6_n: D11.2 R39.2
LED_PWM_7: R40.1 U7.13
LED_PWM_7_n: D14.2 R40.2
LED_PWM_8: R42.1 U7.15
LED_PWM_8_n: D17.2 R42.2
LED_PWM_9: R43.1 U7.16
LED_PWM_9_n: D20.2 R43.2
LED_PWM_10: R44.1 U7.17
LED_PWM_10_n: D23.2 R44.2
LED_PWM_11: R45.1 U7.18
LED_PWM_11_n: D12.2 R45.2
LED_PWM_12: R46.1 U7.19
LED_PWM_12_n: D15.2 R46.2
LED_PWM_13: R47.1 U7.20
LED_PWM_13_n: D18.2 R47.2
LED_PWM_14: R48.1 U7.21
LED_PWM_14_n: D21.2 R48.2
LED_PWM_15: R49.1 U7.22
LED_PWM_15_n: D24.2 R49.2
nEN_IC_LED: R37.2 U7.23
nEN_IC_PWM: R32.2 U6.23
NetD3_B1_1: D3_B1.1 R3_B1.1
NetD3_B2_1: D3_B2.1 R3_B2.1
NetD3_B3_1: D3_B3.1 R3_B3.1
NetD25_2: D25.2 R41.2
NetQ4_3: Q4.3 R41.1
PWM_SERVO11: J3_B1.1
PWM_SERVO12: J3_B2.1
PWM_SERVO13: J3_B3.1
PWM_SERVO21: J4_B1.1
PWM_SERVO22: J4_B2.1
PWM_SERVO23: J4_B3.1
PWM_SERVO31: J5_B1.1
PWM_SERVO32: J5_B2.1
PWM_SERVO33: J5_B3.1
PWM_SERVO41: J6_B1.1
PWM_SERVO42: J6_B2.1
PWM_SERVO43: J6_B3.1
PWM_SERVO51: J7_B1.1
PWM_SERVO52: J7_B2.1
PWM_SERVO53: J7_B3.1
SERVO_PWM_0: Q1.1 U6.6
SERVO_PWM_1: U6.7
SERVO_PWM_2: U6.8
SERVO_PWM_3: U6.9
SERVO_PWM_4: U6.10
SERVO_PWM_5: U6.11
SERVO_PWM_6: U6.12
SERVO_PWM_7: U6.13
SERVO_PWM_8: U6.15
SERVO_PWM_9: U6.16
SERVO_PWM_10: U6.17
SERVO_PWM_11: U6.18
SERVO_PWM_12: U6.19
SERVO_PWM_13: U6.20
SERVO_PWM_14: U6.21
SERVO_PWM_15: U6.22
TEST_SERVO_PWM: J1.1 Q1.3 R1.1
pads on no net: J2.MH0 J2.MH1

## Silkscreen, mask and mechanical layers (free items; w line width, h text height)
M1 Board Outline:
  the board outline again, w0.254